# Altium PCB GPS-Board.PcbDoc
Units mm, origin at the board's own origin, x right, y up, seen from the top; angles counter-clockwise.
Board outline 40 x 40 mm, 2 copper layers (Top Layer, Bottom Layer), stack 1.671 mm thick; 16 components, 14 nets, 97 pads, 123 vias.
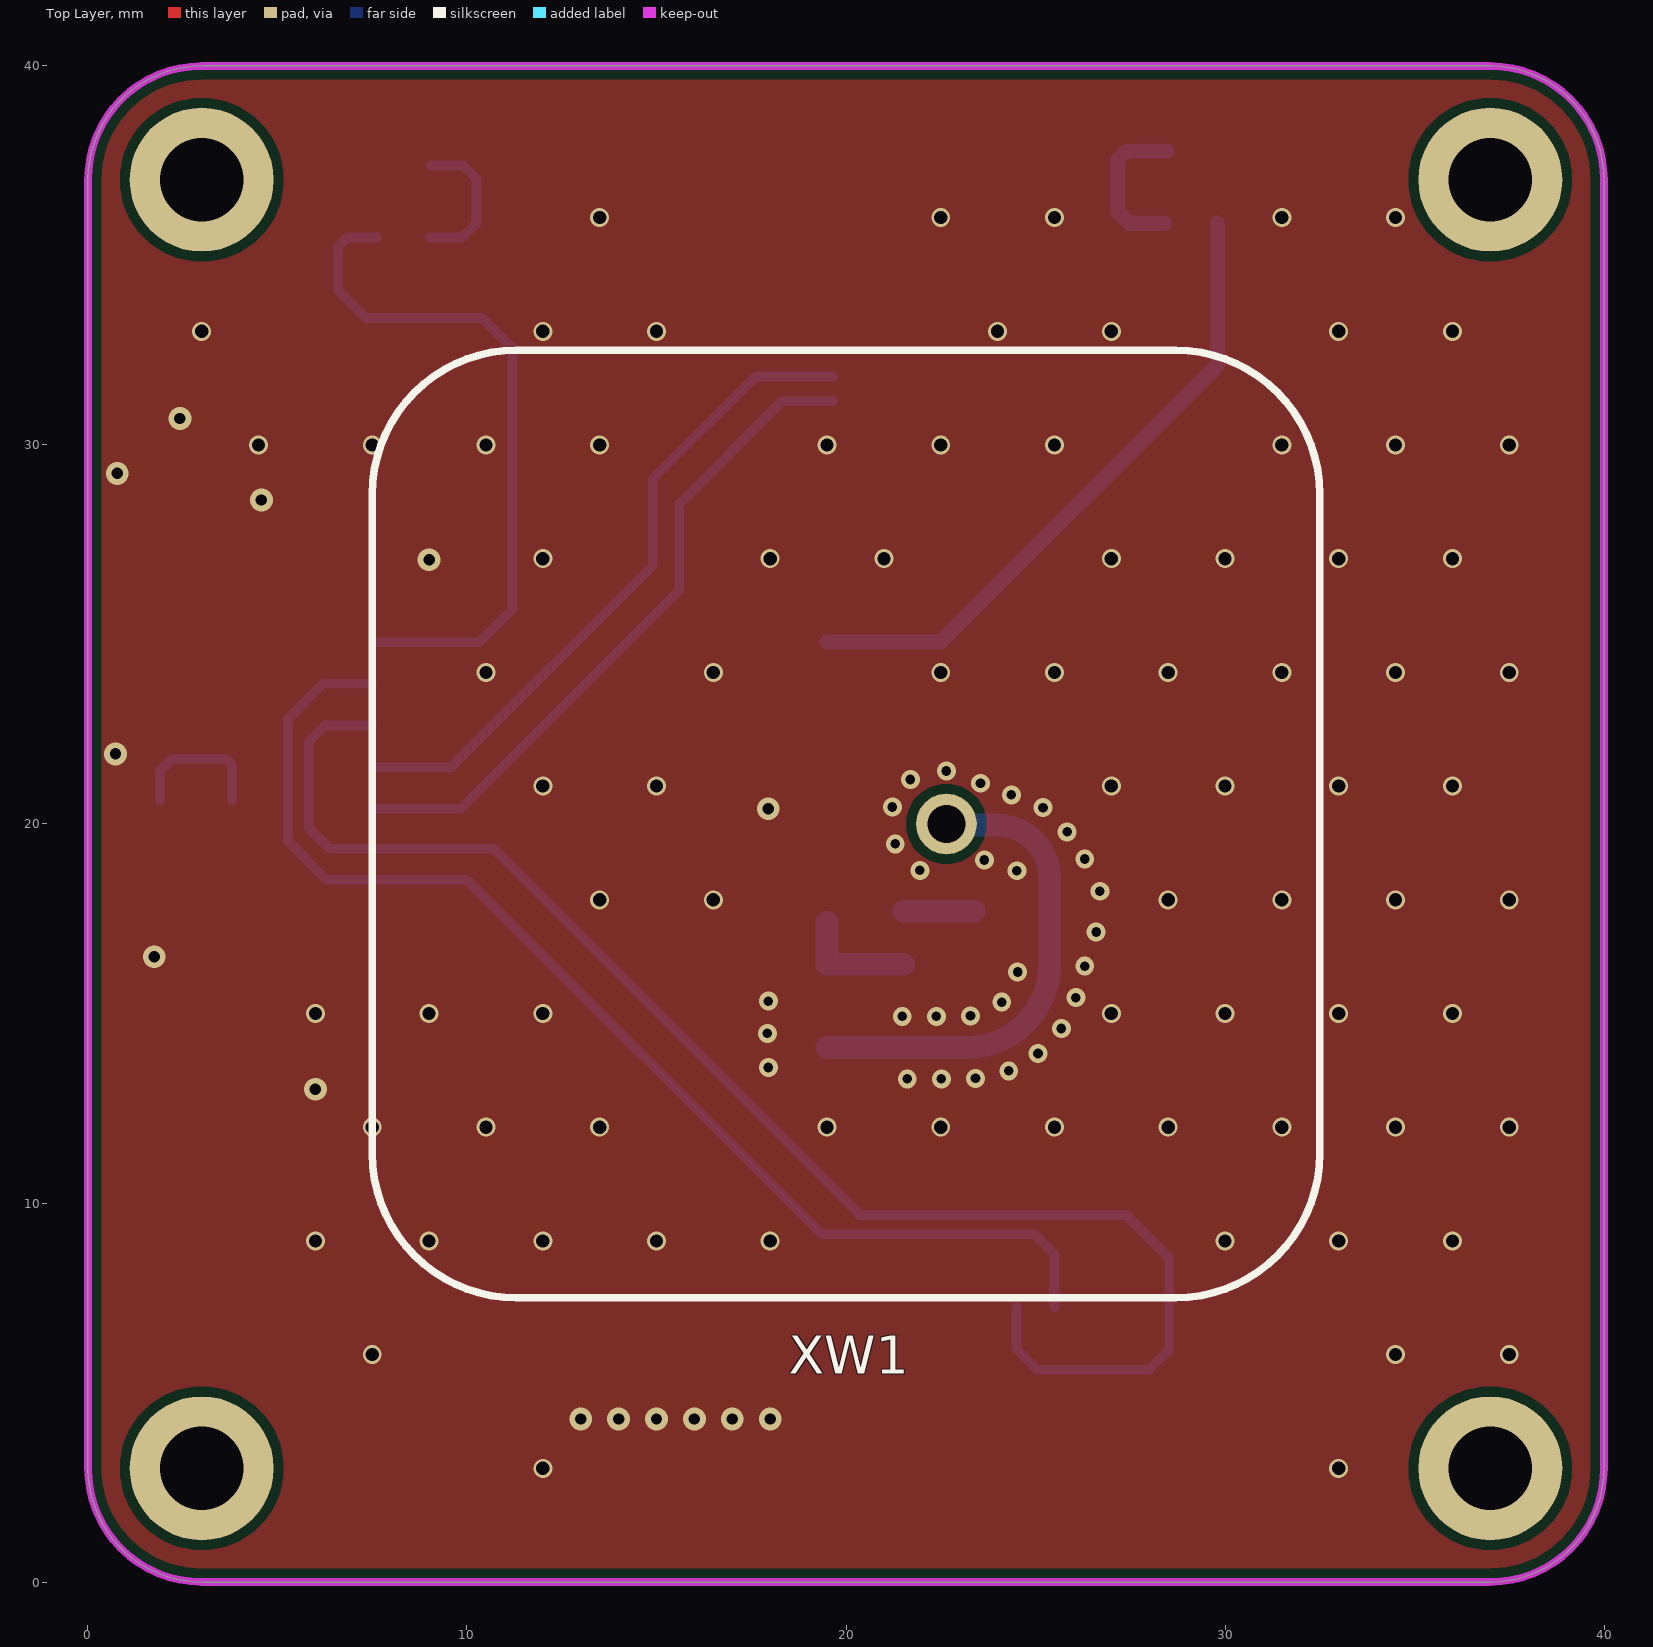
[diagram p0: Top Layer view]
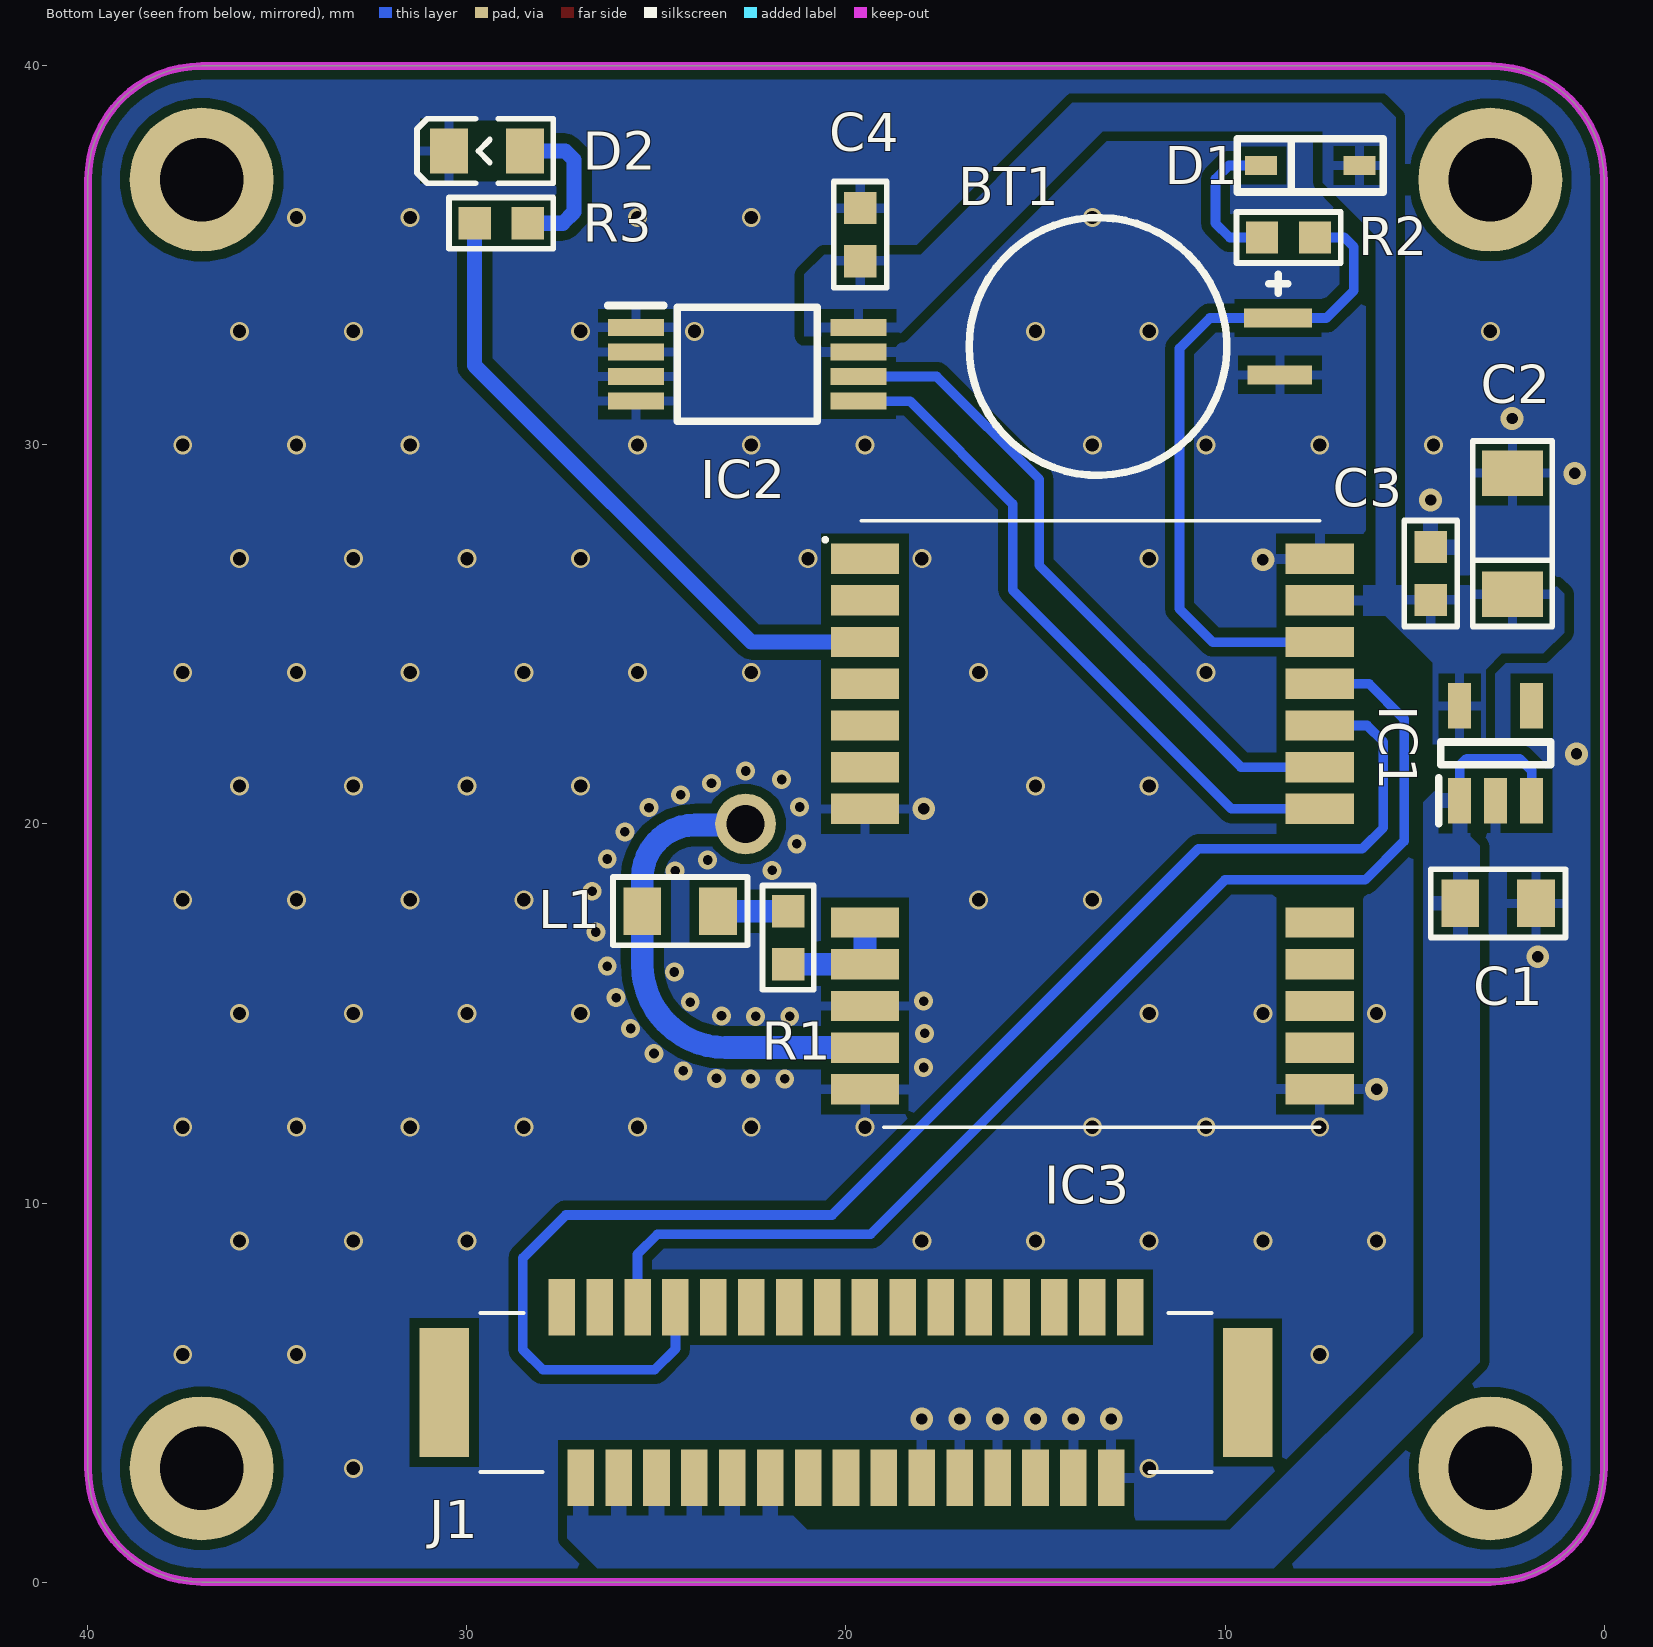
[diagram p1: Bottom Layer view, seen from below]
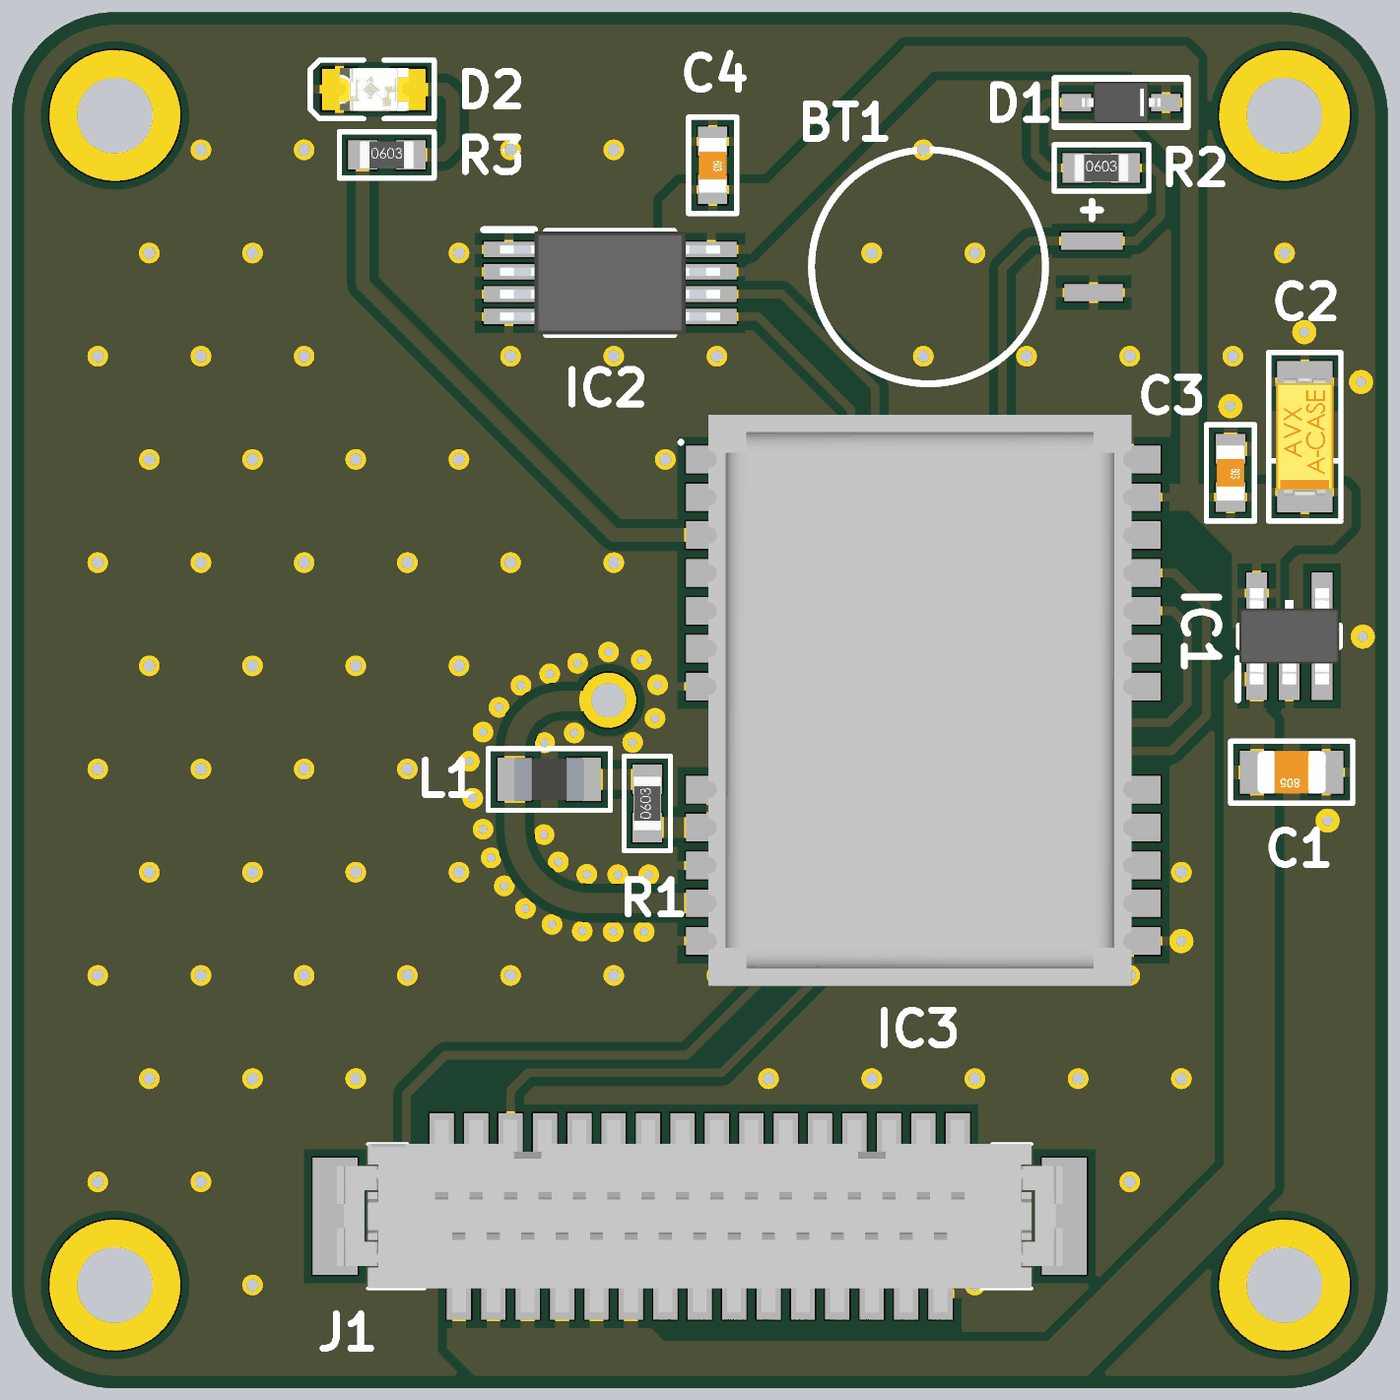
[diagram p2: 3D render of the assembled board from below, using the file's embedded part models]

## Layer stack, top to bottom
Top Solder: solder mask 0.0102, Solder Resist, Dk 3.5
Top Layer: signal copper 0.0356
Dielectric 1: dielectric 1.6, FR-4, Dk 4.8
Bottom Layer: signal copper 0.0356
Bottom Solder: solder mask 0.0102, Solder Resist, Dk 3.5

## Board outline
0,3 0,37 cw(c3,37) 3,40 37,40 cw(c37,37) 40,37 40,3 cw(c37,3) 37,0 3,0 cw(c3,3)

## Design rules (kind name [scope] priority, off if disabled: settings)
BoardOutlineClearance [All] p1: gap=0.2 ignorepadtopadclearanceinfootprint=FALSE
Clearance [All] p1: gap=0.254 ignorepadtopadclearanceinfootprint=FALSE except(0.127: SMDPad-SMDPad; 0.33: Arc-THPad Track-THPad; 0.5: THPad-THPad)
ComponentClearance [All] p1: gap=0 collisioncheckmode=3 verticalgap=0 showdistances=FALSE
HoleSize [All] p1: absolutevalues=TRUE maxlimit=6.3 minlimit=0.2 maxpercent=80.000 minpercent=20.000
MinimumSolderMaskSliver [All] p1: minsoldermaskwidth=0.2
PolygonConnect PolygonConnect_3 [All vs ((InNet('GND') AND InComponent('C3')) OR (InNet('GND') AND InComponent('J2')))] p1: connectstyle=Relief reliefconductorwidth=0.4 reliefentries=4 polygonreliefangle="90 Angle" airgapwidth=0.254
PolygonConnect PolygonConnect_2 [All vs InNet('GND')] p2: thpad.connectstyle=Relief thpad.reliefconductorwidth=0.254 thpad.reliefentries=4 thpad.polygonreliefangle="90 Angle" thpad.airgapwidth=0.254 smdpad.connectstyle=Relief smdpad.reliefconductorwidth=0.254 smdpad.reliefentries=4 smdpad.polygonreliefangle="90 Angle" smdpad.airgapwidth=0.254 via.connectstyle=Direct via.reliefconductorwidth=0.254 via.reliefentries=4 via.polygonreliefangle="90 Angle" via.airgapwidth=0.254
PolygonConnect [All vs InNet('VCC')] p3: connectstyle=Relief reliefconductorwidth=0.4 reliefentries=4 polygonreliefangle="90 Angle" airgapwidth=0.254
PolygonConnect PolygonConnect_1 [All] p4: connectstyle=Relief reliefconductorwidth=0.254 reliefentries=4 polygonreliefangle="90 Angle" airgapwidth=0.254
RoutingCorners [All] p1: cornerstyle=45-Degree minsetback=1.27 maxsetback=1.27
RoutingVias [All] p1: holewidth=0.35 width=0.7 viastyle="Through Hole" minholewidth=0.25 minwidth=0.5 maxholewidth=0.5 maxwidth=1
SMDEntry [All] p1: side=TRUE corner=FALSE anyangle=FALSE
SMDToCorner [All] p1: distance=0
SilkToSolderMaskClearance [IsPad] p1: minsilkscreentomaskgap=0.15 clearancetoexposedcopper=TRUE
SolderMaskExpansion [All] p1: expansion=0.05 istentingtop=FALSE
UnRoutedNet [All] p1: checkbadconnections=TRUE
Width RF [InNet('NetIC2_32')] p1: maxlimit=1.5 minlimit=0.254 preferedwidth=0.254
Width [InNet('VCC')] p2: maxlimit=0.5 minlimit=0.254 preferedwidth=0.35
Width Default [All] p3: maxlimit=0.6 minlimit=0.15 preferedwidth=0.254 minimp=50.000000 maximp=50.000000 favimp=50.000000
24 further rules are at their usual default settings.

## Components (designator, comment, footprint, x,y, rotation, side; value= is the part's Value field where it differs from the comment)
BT1 "MS621FE-FL11E" SEIK-MS621FE-FL11E-2_V 13.35,32.6 r180 bottom
C1 "10uF" "CAP: 0805" 2.794,17.907 r0 bottom
C2 "10uF" "CAP: TANTAL-A" 2.413,27.658 r90 bottom
C3 "100n" "CAP: 0603" 4.572,26.608 r270 bottom
C4 "100n" "CAP: 0603" 19.625,35.55 r270 bottom
D1 "" "DIODE: SOD323" 7.75,37.375 r0 bottom
D2 "=VALUE" LED0805 29.473,37.757 r0 bottom
IC1 "TPS79133DBVR" SOT95P280X145-5N 2.86,21.864 r90 bottom
IC2 "24AA32A-I_ST" SOP65P640X120-8N 22.606,32.131 r180 bottom
IC3 "NEO-6M-0-001" NEO6M0001 14,20 r0 bottom
J1 "DF9-31S-1V_32_" DF931S1V32 20,5 r0 bottom locked
L1 "22uH" "IND: 0805" 24.375,17.7 r0 bottom
R1 "Resistor film, 22R, , 0201, 0.05W, -55...+125°C" "RES: 0603" 21.525,17 r90 bottom value=22R
R2 "Resistor film, 1k, , 0201, 0.05W, -55...+125°C" "RES: 0603" 8.323,35.475 r180 bottom value=1k
R3 "Resistor film, 1k, , 0201, 0.05W, -55...+125°C" "RES: 0603" 29.098,35.852 r180 bottom value=1k
XW1 "=VALUE" "ANT: PCB" 22.65,20 r90 top locked

## Footprints (in the part's own frame and the unit in brackets; to place one, negate y for a bottom-side part, rotate by r counter-clockwise, add the part's x,y. Pads: shape width x height; smd on the part's side, far side on the other; paste and mask are expansions set on the pad)
"ANT: PCB" [mm]
  round 1.6 hole 1: 1(0,0)
  silkscreen extent -12.5,-9.85 12.5,15.15, body extent -12.5,-9.85 12.5,15.15, height 4.3
"CAP: 0603" [mm]
  rect 0.85x0.85 smd: 1(-0.7,0) 2(0.7,0)
  silkscreen extent -1.4,-0.7 1.4,0.7, body extent -0.8,-0.4 0.8,0.4, height 0.3
"CAP: 0805" [mm]
  rect 1x1.25 smd: 1(-1,0) 2(1,0)
  silkscreen extent -1.78,-0.9 1.78,0.9, body extent -1,-0.62 1,0.63, height 0.78
"CAP: TANTAL-A" [mm]
  rect 1.2x1.6 smd: 1(-1.6,0) 2(1.6,0)
  silkscreen extent -2.45,-1.05 2.45,1.05, body extent -1.7,-0.84 1.7,0.84, height 1.71
DF931S1V32 [mm]
  rect 0.7x1.5 smd: 1(-7.5,-2.25) 2(-7,2.25) 3(-6.5,-2.25) 4(-6,2.25) 5(-5.5,-2.25) 6(-5,2.25) 7(-4.5,-2.25) 8(-4,2.25) 9(-3.5,-2.25) 10(-3,2.25) 11(-2.5,-2.25) 12(-2,2.25) 13(-1.5,-2.25) 14(-1,2.25) 15(-0.5,-2.25) 16(0,2.25) 17(0.5,-2.25) 18(1,2.25) 19(1.5,-2.25) 20(2,2.25) 21(2.5,-2.25) 22(3,2.25) 23(3.5,-2.25) 24(4,2.25) 25(4.5,-2.25) 26(5,2.25) 27(5.5,-2.25) 28(6,2.25) 29(6.5,-2.25) 30(7,2.25) 31(7.5,-2.25)
  rect 1.3x3.4 smd: MP1(-10.6,0) MP2(10.6,0)
  silkscreen extent -9.65,-2.1 9.65,2.1, body extent -10.55,-2.81 10.55,2.79, height 3.3
"DIODE: SOD323" [mm]
  rect 0.85x0.5 smd: 1(-1.3,0) 2(1.3,0)
  silkscreen extent -1.92,-0.7 1.92,0.7, body extent -1.15,-0.6 1.15,0.6, height 1.04
"IND: 0805" [mm]
  rect 1x1.25 smd: 1(-1,0) 2(1,0)
  silkscreen extent -1.78,-0.9 1.78,0.9, body extent -1,-0.62 1,0.63, height 0.85
LED0805 [mm] "LED SMD 0805, WHITE"
  rect 1x1.2 smd paste-2 mask+0.075: 1(-1,0) 2(1,0)
  Top Layer pour cut-out: -0.5,0.8 0.5,0.8 0.5,-0.8 -0.5,-0.8
  silkscreen extent -1.75,-0.85 1.85,0.85, body extent -1,-0.63 1,0.63, height 0.7
NEO6M0001 [mm]
  rect 1.8x0.8 smd: 1(5.5,-7) 2(5.5,-5.9) 3(5.5,-4.8) 4(5.5,-3.7) 5(5.5,-2.6) 6(5.5,-1.5) 7(5.5,-0.4) 8(5.5,2.6) 9(5.5,3.7) 10(5.5,4.8) 11(5.5,5.9) 12(5.5,7) 13(-6.5,7) 14(-6.5,5.9) 15(-6.5,4.8) 16(-6.5,3.7) 17(-6.5,2.6) 18(-6.5,-0.4) 19(-6.5,-1.5) 20(-6.5,-2.6) 21(-6.5,-3.7) 22(-6.5,-4.8) 23(-6.5,-5.9) 24(-6.5,-7)
  silkscreen extent -6.5,-8 6.6,8, body extent -6.55,-8.3 5.75,8.3, height 2.64
"RES: 0603" [mm]
  rect 0.85x0.85 smd: 1(-0.7,0) 2(0.7,0)
  silkscreen extent -1.38,-0.67 1.38,0.67, body extent -0.8,-0.4 0.8,0.4, height 0.44
SEIK-MS621FE-FL11E-2_V [mm] "SMD, 2-Leads, Diameter 6.8mm"
  rect 1.8x0.5 smd: 1(4.75,0.75)
  rect 1.7x0.5 smd: 2(4.8,-0.75)
  silkscreen extent -3.4,-3.4 5,3.4, body extent -3.4,-3.4 4.35,3.4, height 2.7
SOP65P640X120-8N [mm]
  rect 1.475x0.45 smd: 1(-2.938,0.975) 2(-2.938,0.325) 3(-2.938,-0.325) 4(-2.938,-0.975) 5(2.938,-0.975) 6(2.938,-0.325) 7(2.938,0.325) 8(2.938,0.975)
  silkscreen extent -3.67,-1.5 1.85,1.55, body extent -3.2,-1.5 3.2,1.5, height 1.2
SOT95P280X145-5N [mm]
  rect 1.2x0.6 smd: 1(-1.25,0.95) 2(-1.25,0) 3(-1.25,-0.95) 4(1.25,-0.95) 5(1.25,0.95)
  silkscreen extent -1.85,-1.45 0.3,1.5, body extent -1.4,-1.45 1.4,1.45, height 1.2

## Part data
BT1: library part CMP-2000-05342-1, "MS Lihium Rechargeable Battery, 3 V, -20 to 60 degC, Tray", Capacity=5.5mAh, Manufacturer=SeikoInstruments, Output Voltage=3V, Battery Size=621, Brand=SeikoInstrumentsMicroEnergy, Chemistry=Lithium, Datasheet URL=http://datasheet.octopart.com/MS621FE-FL11E-Seiko-datasheet-5320152.pdf, Datasheet Version=Jan-08, Diameter=6.8mm, Factory Pack Quantity=100, Height=2.1mm, Manufacturer URL=http://www.sii.co.jp/en/, Mounting Style=WithLeads, Orientation=Vertical, Packaging=Tray, Product Category=CoinCellBattery, Rechargeable/Non-Rechargeable=Rechargeable, RoHS=NotApplicable, Series=MS, Termination Style=ThroughHole, Type=CoinCellBatterywithLeads, Unit Weight=0.008113oz
C1 C3 C4: library part Capacitor, "SMD Capacitor"
C2: library part Capacitor_polar, "SMD Capacitor Polar"
D1: library part Diode, "Rectifier Diode"
D2: library part LED, "Chip LED"
IC1: "Integrated Circuit", Manufacturer_Name="Texas Instruments", Mouser Part Number=595-TPS79133DBVR, Arrow Part Number=TPS79133DBVR, Arrow Price/Stock=https://www.arrow.com/en/products/tps79133dbvr/texas-instruments?region=nac, Datasheet Link=https://datasheet.lcsc.com/szlcsc/Texas-Instruments-TI-TPS79133DBVR_C9838.pdf, Height=1.45mm, Manufacturer_Part_Number=TPS79133DBVR, Mouser Price/Stock=https://www.mouser.co.uk/ProductDetail/Texas-Instruments/TPS79133DBVR?qs=tJ5HNKWh3OXEQKJOaYvX6A%3D%3D
IC2: "Integrated Circuit", Arrow Part Number=24AA32A-I/ST, Manufacturer_Name=Microchip, Mouser Part Number=579-24AA32A-I/ST, Arrow Price/Stock=https://www.arrow.com/en/products/24aa32a-ist/microchip-technology?region=nac, Datasheet Link=http://ww1.microchip.com/downloads/en/DeviceDoc/21713M.pdf, Height=1.2mm, Manufacturer_Part_Number=24AA32A-I/ST, Mouser Price/Stock=https://www.mouser.co.uk/ProductDetail/Microchip-Technology/24AA32A-I-ST/?qs=z30FE1aq6wbUu0ZQUmtPYw%3D%3D
IC3: "Integrated Circuit", Manufacturer_Name=U-Blox, Datasheet Link=https://www.u-blox.com/sites/default/files/products/documents/NEO-6_DataSheet_%28GPS.G6-HW-09005%29.pdf, Height=2.6mm, Manufacturer_Part_Number=NEO-6M-0-001
J1: "Connector", Arrow Part Number=DF9-31S-1V(32), Manufacturer_Name=Hirose, Mouser Part Number=798-DF9-31S-1V32, Arrow Price/Stock=https://www.arrow.com/en/products/df9-31s-1v-32/hirose-electric, Datasheet Link=http://www.mouser.com/ds/2/185/DF9_catalog-939217.pdf, Height=3.3mm, Manufacturer_Part_Number=DF9-31S-1V(32), Mouser Price/Stock=https://www.mouser.co.uk/ProductDetail/Hirose-Connector/DF9-31S-1V32?qs=zOgoZG1CgI88k8P2oY2QVw%3D%3D, System=Connector
L1: library part IND_SMD, "INDUCTOR, SMD"
R1 R2 R3: library part Resistor, Manufacturer=Yageo, Package=0201, PartNumber=RC0201JR-07100RL, Power=0.05W, Temperature=-55...+125°C, TypeResistor="Resistor film", HelpURL=https://www.digikey.com/product-detail/en/yageo/RC0201JR-07100RL/311-100NCT-ND/1949006
  R1: ValueManufacturerPartNumber="Resistor film, 22R, , 0201, 0.05W, -55...+125°C"
  R2 R3: ValueManufacturerPartNumber="Resistor film, 1k, , 0201, 0.05W, -55...+125°C"
XW1: library part "Connector RF"

## Free pads (board coordinates)
  round 3.8 hole 2.2: 5(3,3) 5(3,37) 5(37,3) 5(37,37)

## Via types
v1: diameter 0.5, hole 0.35, Top Layer to Bottom Layer, 79 vias
v2: diameter 0.5, hole 0.254, Top Layer to Bottom Layer, 30 vias
v3: diameter 0.6, hole 0.3, Top Layer to Bottom Layer, 14 vias

## Nets (pads, with @x,y where several pads share a name; then routed paths per layer and width w, separated by ;. In a path a pad name is that pad's centre, name@x,y a point inside that pad or via, vN(x,y) a via of type N, cw(c..) or ccw(c..) an arc to the next point about the centre after c; other vN are vias at no path point)
+3.3V: C2.1 C3.2 C4.2 D1.1 IC1.5 IC2.8 IC3.23
GND: BT1.2 C1.1 C2.2 C3.1 C4.1 D2.2 IC1.2 IC2.1 IC2.2 IC2.3 IC2.4 IC2.7 IC3.7 IC3.10 IC3.12 IC3.13 IC3.24 J1.2 J1.4 J1.6 J1.8 J1.10 J1.12
  other v1: 12,3 33,3 7.5,6 34.5,6 37.5,6 6,9 9,9 12,9 15,9 18,9 30,9 33,9 36,9 7.5,12 10.5,12 13.5,12 19.5,12 22.5,12 25.5,12 28.5,12 31.5,12 34.5,12 37.5,12 6,15 9,15 12,15 27,15 30,15 33,15 36,15 13.5,18 16.5,18 28.5,18 31.5,18 34.5,18 37.5,18 12,21 15,21 27,21 30,21 33,21 36,21 10.5,24 16.5,24 22.5,24 25.5,24 28.5,24 31.5,24 34.5,24 37.5,24 12,27 18,27 21,27 27,27 30,27 33,27 36,27 4.5,30 7.5,30 10.5,30 13.5,30 19.5,30 22.5,30 25.5,30 31.5,30 34.5,30 37.5,30 3,33 12,33 15,33 24,33 27,33 33,33 36,33 13.5,36 22.5,36 25.5,36 31.5,36 34.5,36
  other v2: 21.616,13.274 22.516,13.274 23.416,13.289 24.294,13.485 17.952,13.575 25.067,13.946 17.925,14.475 25.682,14.604 21.485,14.926 22.385,14.926 23.285,14.937 24.109,15.298 17.95,15.325 26.064,15.419 24.529,16.094 26.3,16.25 26.6,17.15 26.7,18.225 21.95,18.775 24.51,18.766 23.65,19.05 26.3,19.075 21.3,19.475 25.833,19.794 25.197,20.431 21.225,20.45 24.363,20.767 23.55,21.075 21.7,21.175 22.65,21.4
  other v3: 13,4.3 14,4.3 15,4.3 16,4.3 17,4.3 18,4.3 6,13 1.75,16.5 17.95,20.4 0.725,21.85 9,26.975 4.575,28.55 0.775,29.25 2.425,30.7
GSCL: IC2.6 IC3.19 | length 17.8
  Bottom Layer w0.254: IC3.19 9.578,21.5 14.901,26.823 14.901,29.098 17.609,31.806 IC2.6
GSDA: IC2.5 IC3.18 | length 18
  Bottom Layer w0.254: IC3.18 9.831,20.4 15.603,26.172 15.603,28.447 18.312,31.156 IC2.5
NetBT1_1: BT1.1 IC3.22 R2.2 | length 18.4
  Bottom Layer w0.254: IC3.22 10.325,24.8 11.2,25.675 11.2,32.55 10.4,33.35 BT1.1 7.325,33.35 6.6,34.075 6.6,35.225 6.85,35.475 R2.2
NetD1_2: D1.2 R2.1 | length 3.9
  Bottom Layer w0.254: R2.1 9.875,35.475 10.25,35.85 10.25,37.025 9.9,37.375 D1.2
NetD2_1: D2.1 R3.2 | length 4.1
  Bottom Layer w0.4: R3.2 27.473,35.852 27.175,36.15 27.175,37.525 27.407,37.757 D2.1
NetIC3_3: IC3.3 R3.1 | length 17.1
  Bottom Layer w0.4: IC3.3 22.5,24.8 29.798,32.098 R3.1
NetIC3_8: IC3.8 IC3.9 R1.1 | length 3.1
  Bottom Layer w0.6: IC3.8 IC3.9 R1.1
NetIC3_11: IC3.11 L1.2 XW1.1 | length 12.9
  Bottom Layer w0.6: IC3.11 23.175,14.1 ccw(c23.175,16.3) 25.375,16.3 25.375,17.675 25.375,18.575 ccw(c23.975,18.575) 23.975,19.975 22.675,19.975 cw(c22.675,20) XW1.1
NetL1_1: L1.1 R1.2 | length 1.9
  Bottom Layer w0.6: R1.2 L1.1
UART1_RX: IC3.20 J1.25 | length 39.5
  Bottom Layer w0.254: IC3.20 6.25,22.6 5.825,22.175 5.825,19.9 6.375,19.35 10.7,19.35 20.367,9.683 27.392,9.683 28.525,8.55 28.525,6.125 28,5.6 25.05,5.6 24.5,6.15 J1.25
UART1_TX: IC3.21 J1.27 | length 32
  Bottom Layer w0.254: IC3.21 6.2,23.7 5.275,22.775 5.275,19.55 6.3,18.525 10,18.525 19.35,9.175 24.975,9.175 25.5,8.65 J1.27
VCC: C1.2 IC1.1 IC1.3 J1.20 J1.22 J1.24 J1.26 J1.28 J1.30 | length 3.8
  Bottom Layer w0.254: IC1.3 1.91,21.41 2.225,21.725 3.625,21.725 3.81,21.54 IC1.1
pads on no net: IC1.4 IC3.1 IC3.2 IC3.4 IC3.5 IC3.6 IC3.14 IC3.15 IC3.16 IC3.17 J1.1 J1.3 J1.5 J1.7 J1.9 J1.11 J1.13 J1.14 J1.15 J1.16 J1.17 J1.18 J1.19 J1.21 J1.23 J1.29 J1.31 J1.MP1 J1.MP2

## Polygon pours and split planes (outlines as drawn)
GND on Bottom Layer "NONET_L-01_P-001" (solid, pour order 6): 0,3 0,37 cw(c3,37) 3,40 37,40 cw(c37,37) 40,37 40,3 cw(c37,3) 37,0 3,0 cw(c3,3)
VCC on Bottom Layer "NONET_L-01_P-001" (solid, pour order 0): 21.65,3.75 27.35,3.75 27.35,1.15 26.35,0.15 8.925,0.15 3.275,5.8 3.275,19.425 3.525,19.675 3.525,21.225 4.125,21.225 4.775,20.575 4.775,6.475 9.875,1.375 21.025,1.375 21.65,2
+3.3V on Bottom Layer "NONET_L-01_P-001" (solid, pour order 4): 21.1,34.5 20.575,35.025 18.025,35.025 14.025,39.025 5.875,39.025 5.5,38.65 5.5,37.608 6.167,38.275 13.225,38.275 18.625,32.875 21.1,32.875
+3.3V on Bottom Layer "NONET_L-01_P-001" (solid, pour order 3): 5.5,26.3 5.5,37.825 5.95,38.275 7.425,38.275 7.425,36.925 6.025,35.525 6.025,26.3
+3.3V on Bottom Layer "NONET_L-01_P-001" (solid, pour order 2): 8.4,26.3 3.55,26.3 3.2,26.65 1.625,26.65 1.05,26.075 1.05,25.05 1.6,24.5 2.7,24.5 3.125,24.075 3.125,22.1 4.525,22.1 4.525,24.25 5.775,25.5 8.4,25.5
GND on Top Layer "NONET_L-01_P-001" (solid, pour order 7): 0,3 0,37 cw(c3,37) 3,40 37,40 cw(c37,37) 40,37 40,3 cw(c37,3) 37,0 3,0 cw(c3,3)

## Keep-outs
Keep-Out Layer:
  the board outline again, w0.2